# Altium PCB MPPT PCB.PcbDoc
Units mm, origin at the board's own origin, x right, y up, seen from the top; angles counter-clockwise.
Board outline 104.4 x 105.65 mm, 2 copper layers (Top Layer, Bottom Layer); 101 components, 54 nets, 293 pads, 71 vias.
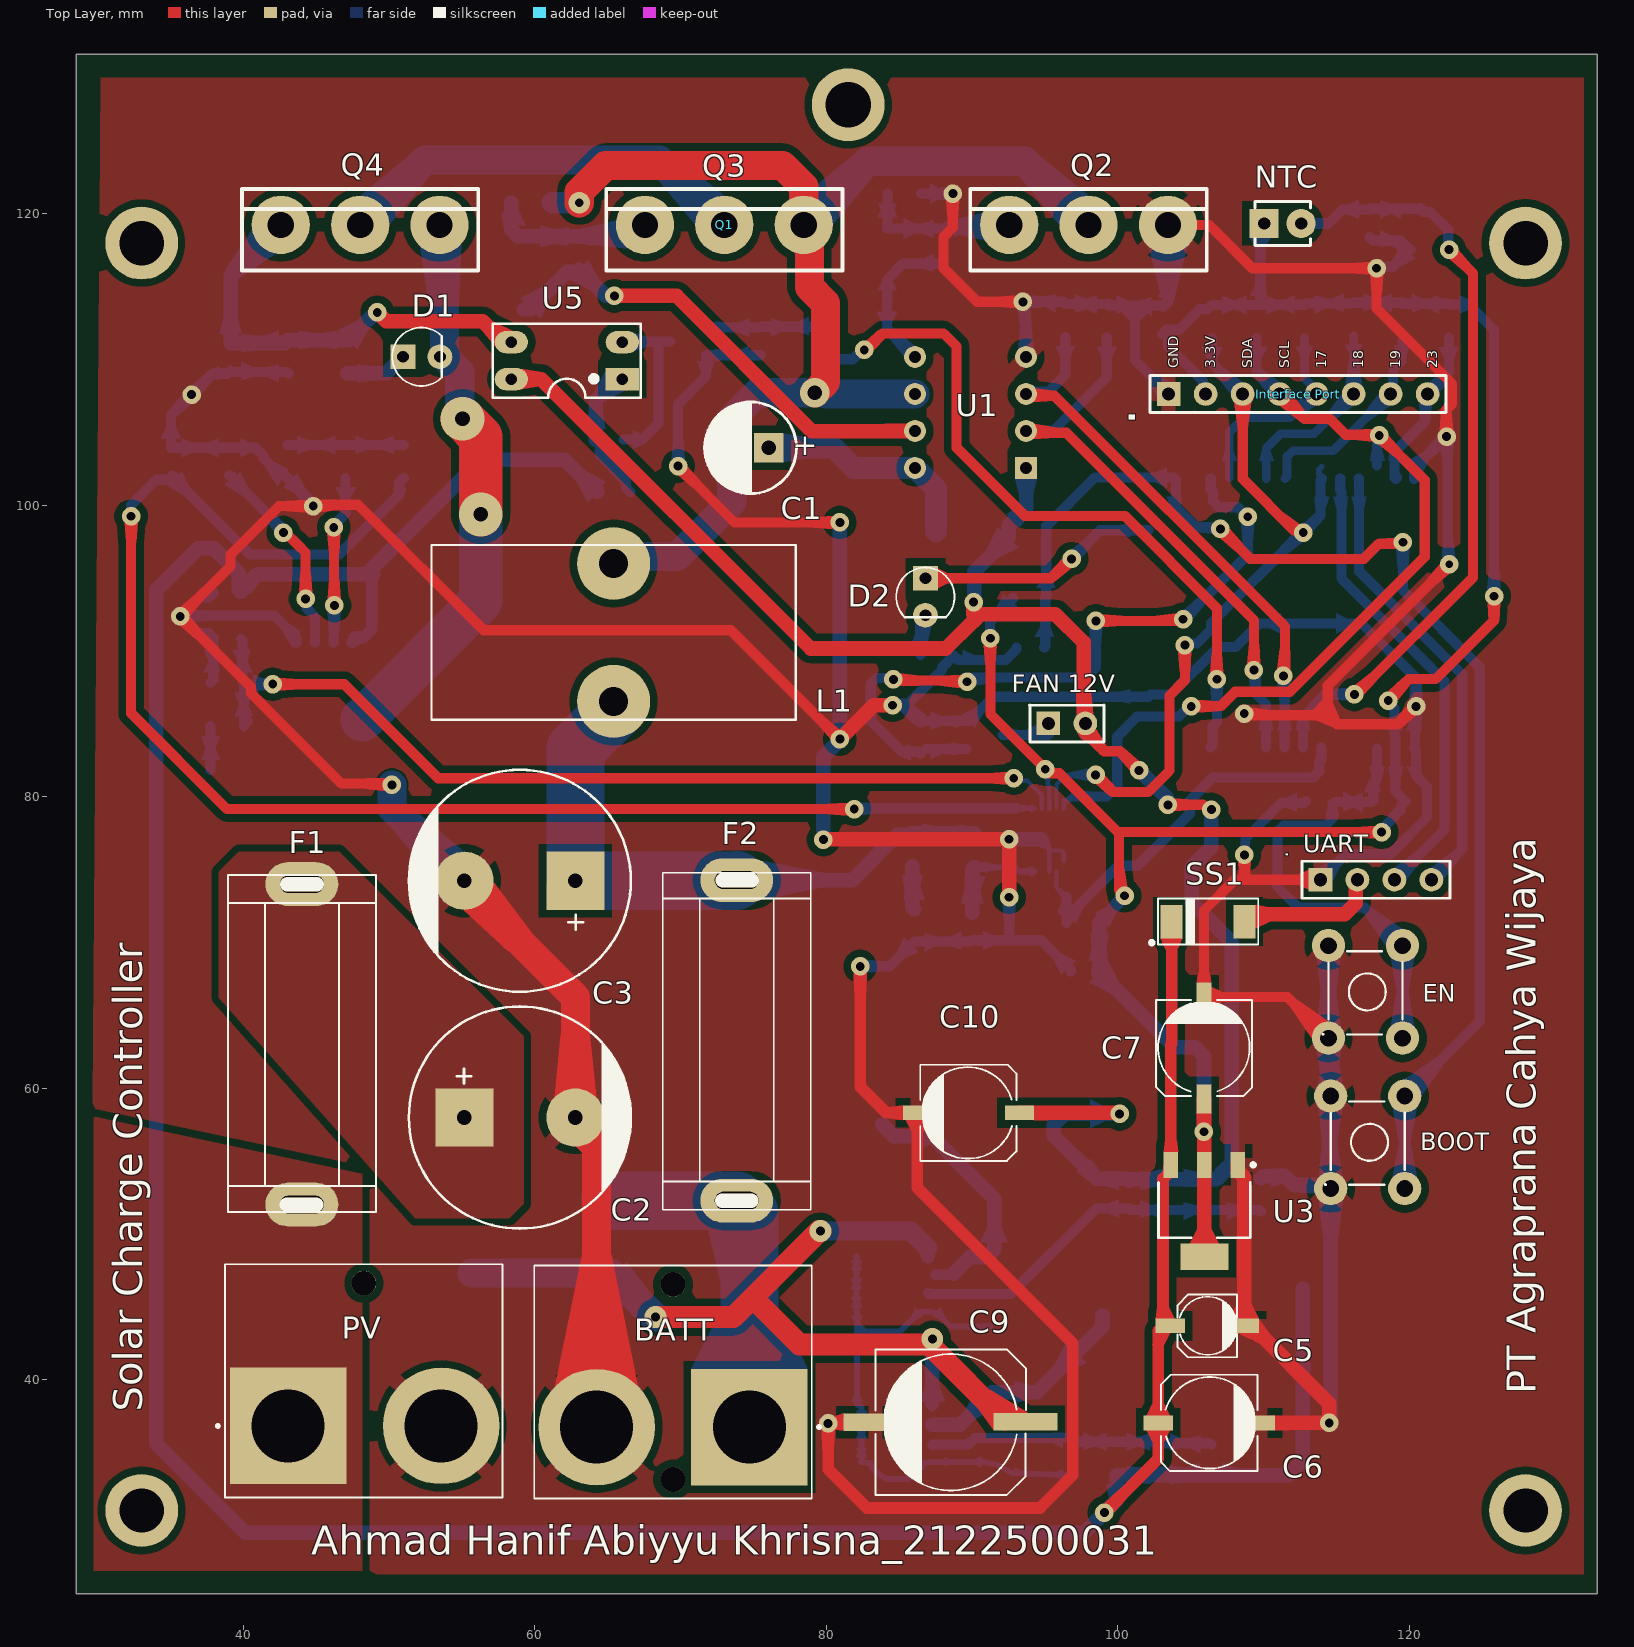
[diagram p0: Top Layer view]
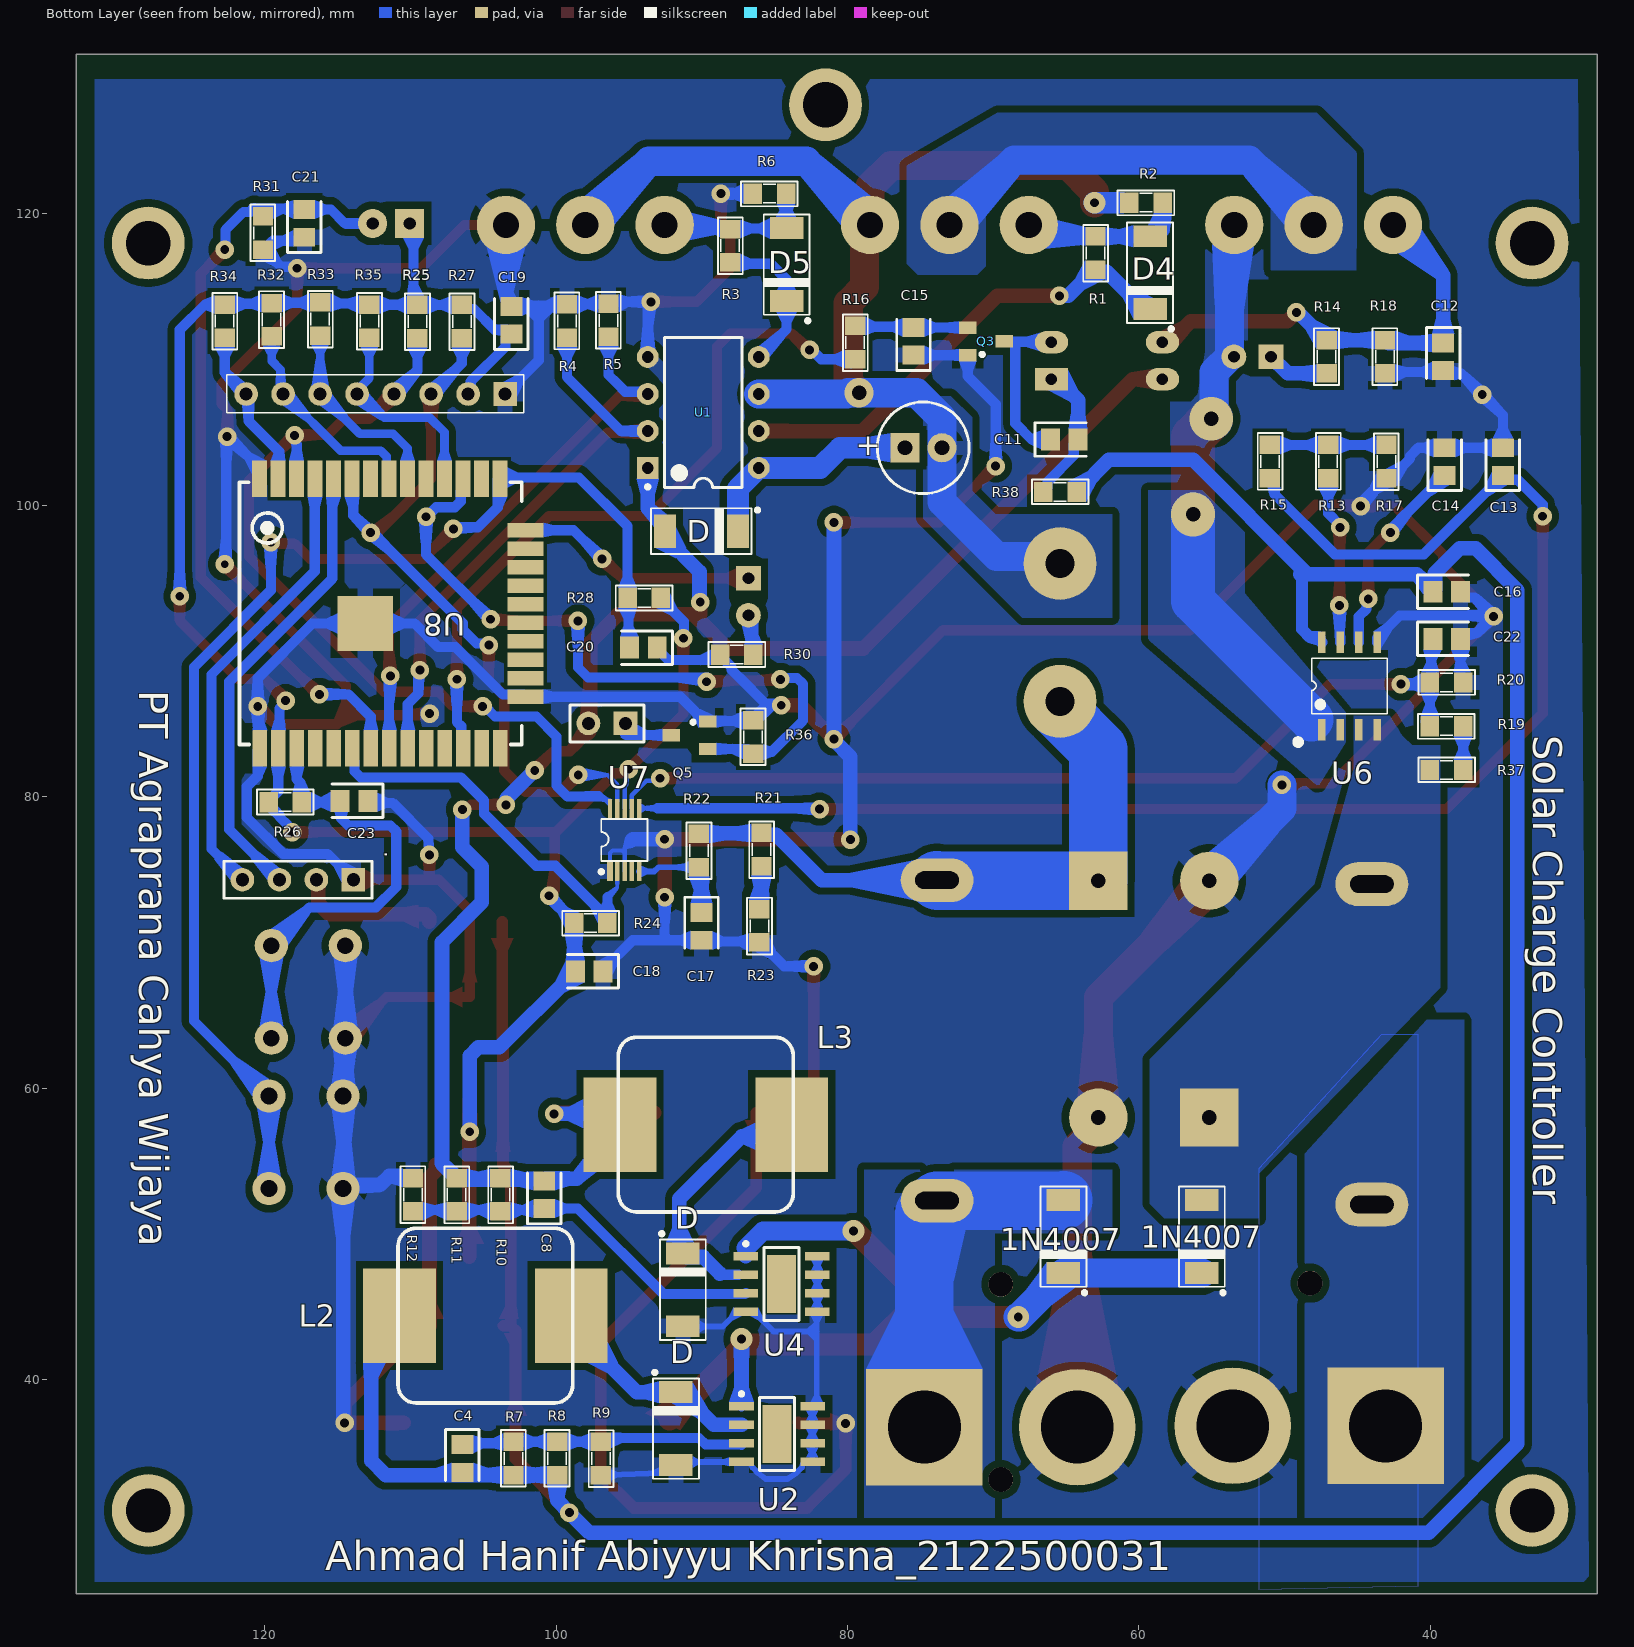
[diagram p1: Bottom Layer view, seen from below]
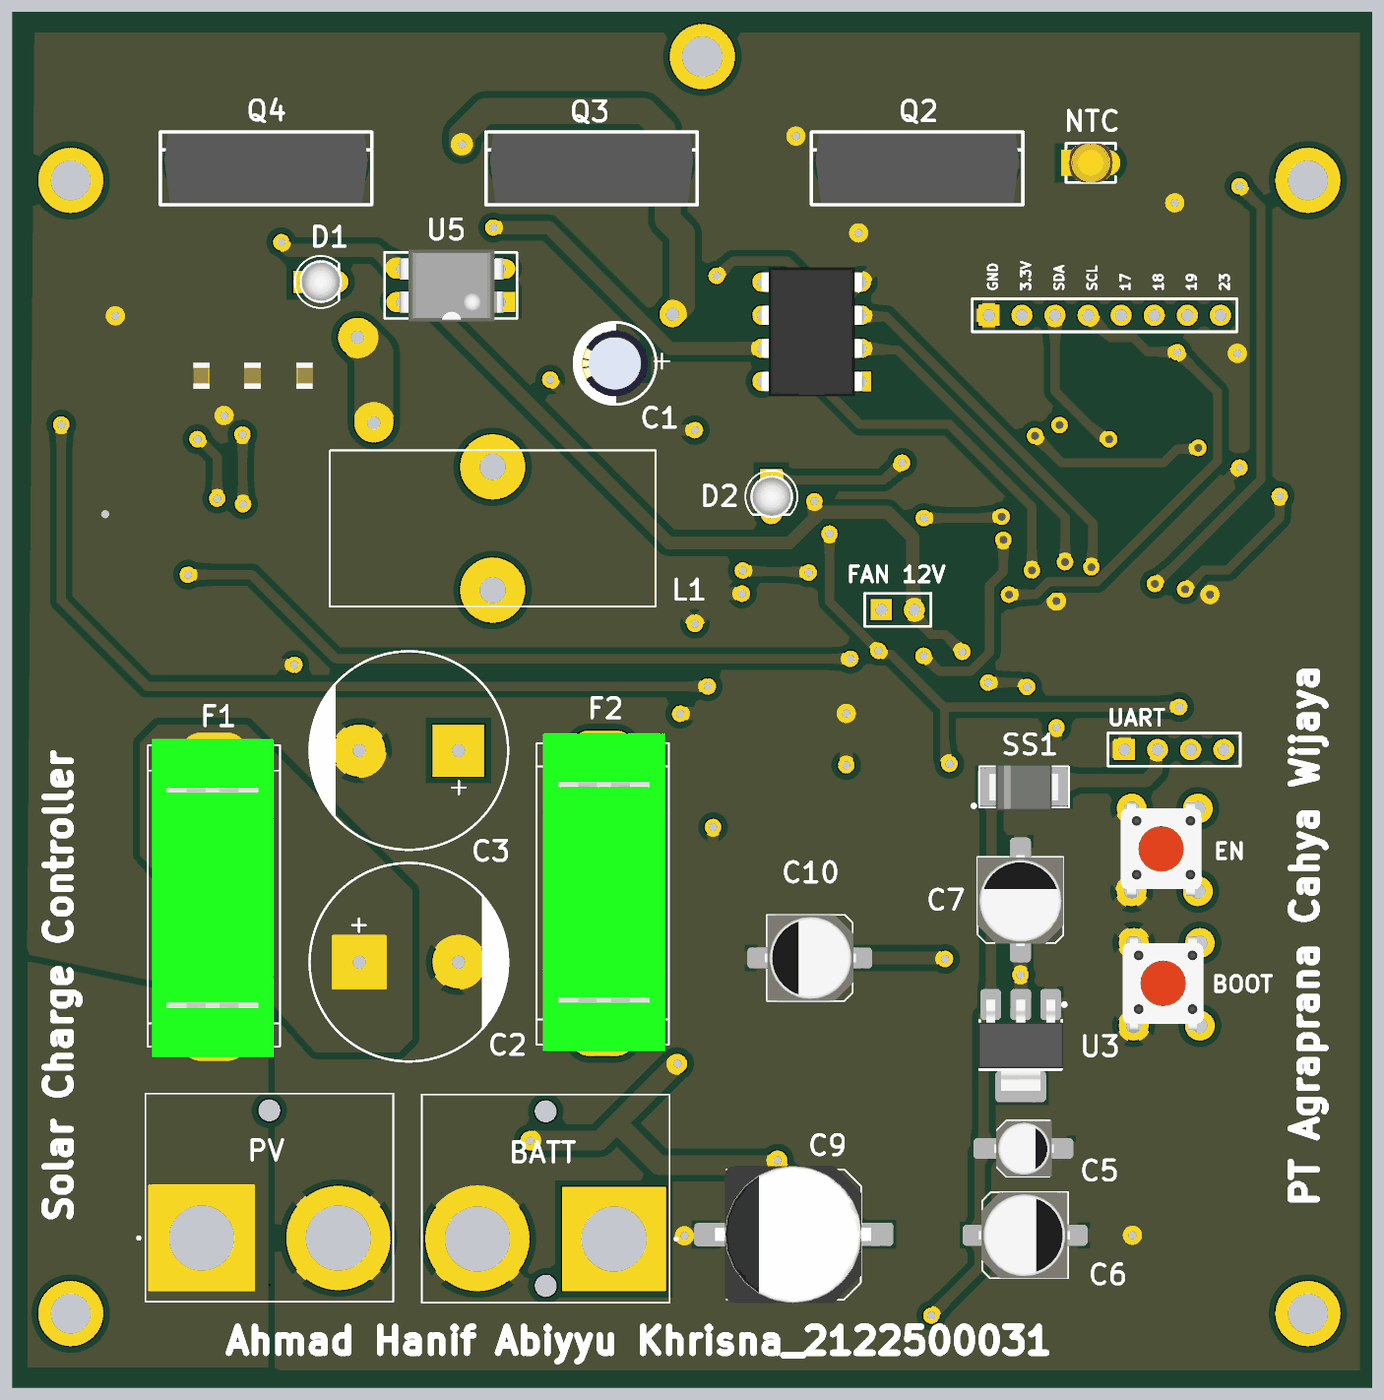
[diagram p2: 3D render of the assembled board from above, using the file's embedded part models]
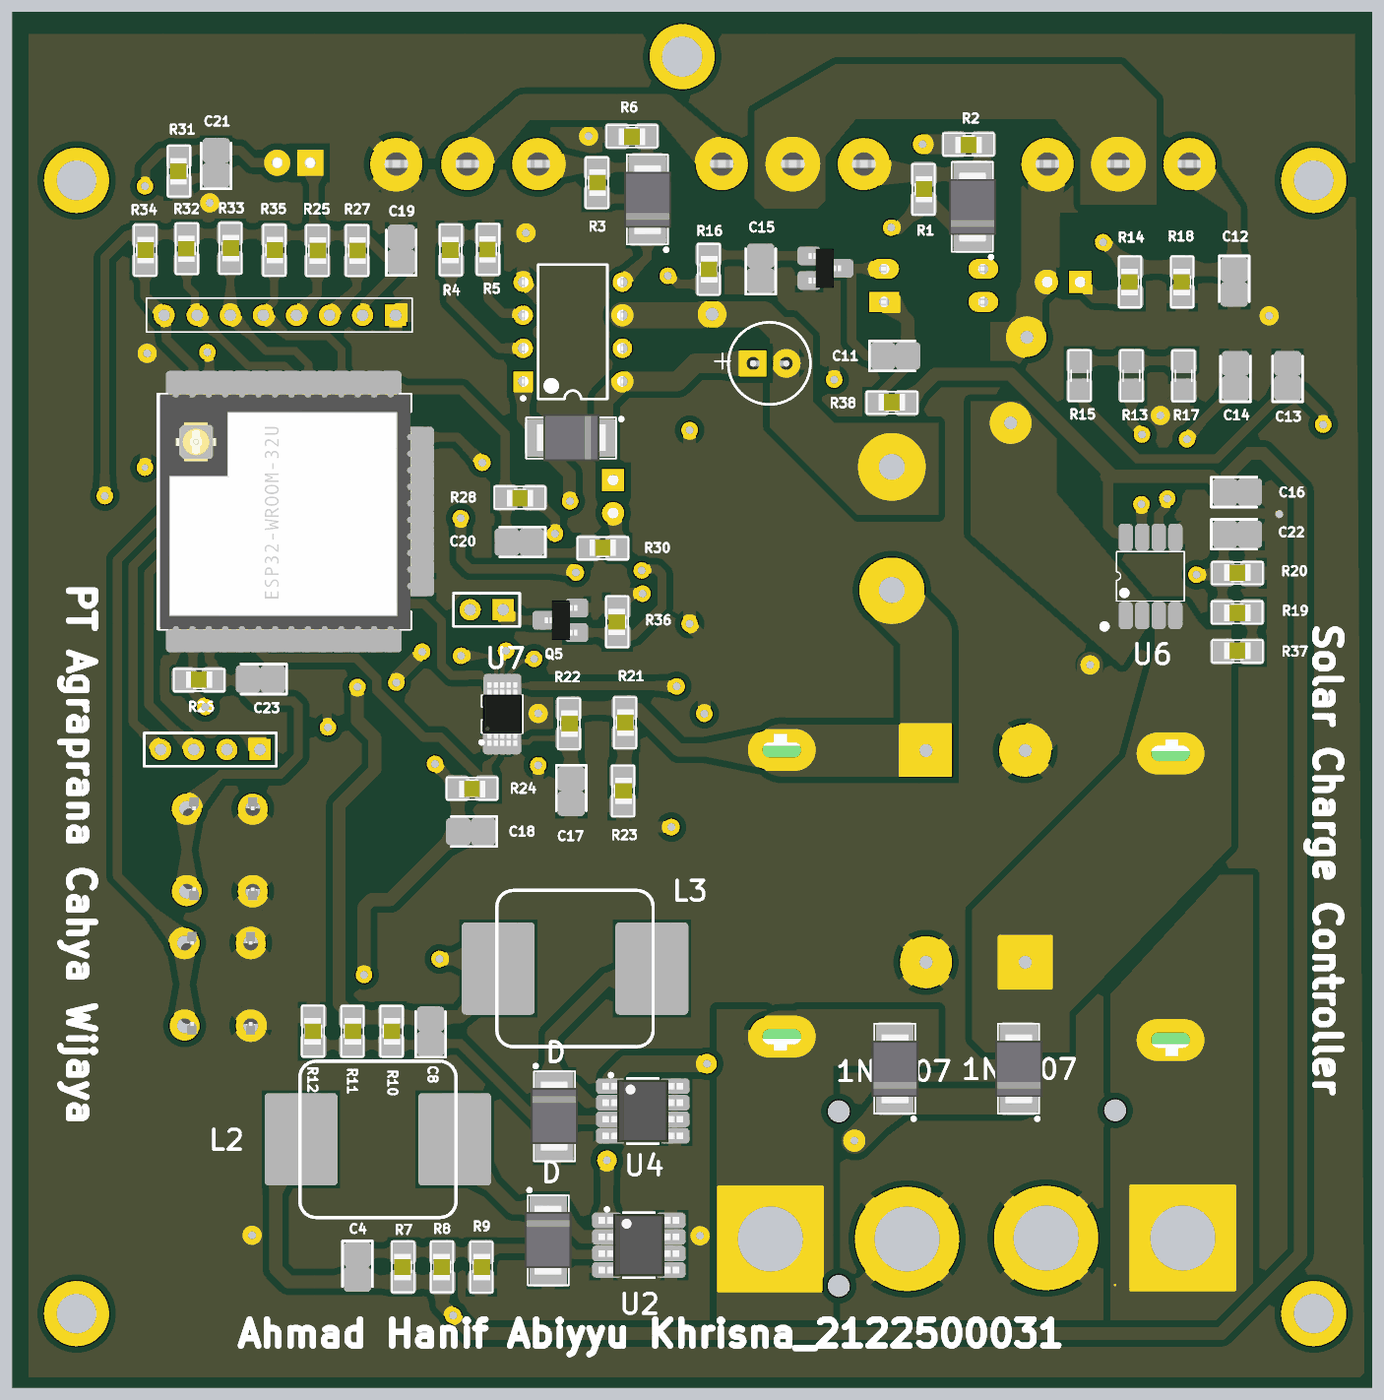
[diagram p3: 3D render of the assembled board from below, using the file's embedded part models]

## Layer stack, top to bottom
Top Solder: solder mask 0.0102, Solder Resist, Dk 3.5
Top Layer: signal copper 0.0356
Dielectric 1: dielectric 0.32, FR-4, Dk 4.8
Bottom Layer: signal copper 0.0356
Bottom Solder: solder mask 0.0102, Solder Resist, Dk 3.5

## Board outline
28.525,25.3 28.525,130.95 132.925,130.95 132.925,25.3

## Design rules (kind name [scope] priority, off if disabled: settings)
Clearance Clearance_5 [InNet('SCL') vs InNet('GPIO32')] p1: gap=0.1 ignorepadtopadclearanceinfootprint=TRUE
Clearance Clearance_3 [OnBottomLayer vs HasFootprint('SOIC-8N')] p2: gap=0.1 ignorepadtopadclearanceinfootprint=TRUE
Clearance Clearance_1 [(OnBottomLayer) vs HasFootprint('MSOP-10')] p3: gap=0.1 ignorepadtopadclearanceinfootprint=TRUE
Clearance Clearance_2 [OnBottomLayer vs HasFootprint('ESP32-32U')] p4: gap=0.254 ignorepadtopadclearanceinfootprint=TRUE
Clearance [All] p5: gap=0.508 ignorepadtopadclearanceinfootprint=TRUE
PasteMaskExpansion [All] p1: expansion=0.3 thpadusetoppaste=TRUE thpadusebottompaste=TRUE
PlaneClearance [All] p1: clearance=1
PolygonConnect PolygonConnect_3 [InNet('Out -')] p1: connectstyle=Relief reliefconductorwidth=1 reliefentries=4 polygonreliefangle="90 Angle" conductorbypadedge=TRUE mindistance=0.381 enablemindistance=FALSE airgapwidth=0.5
PolygonConnect PolygonConnect_2 [InNet('Net1N4007_1_1')] p2: connectstyle=Direct reliefconductorwidth=0.254 reliefentries=4 polygonreliefangle="90 Angle" airgapwidth=0.254
PolygonConnect PolygonConnect_1 [InNet('NetF1_1') vs InNet('Net1N4007_1_1')] p3: connectstyle=Direct reliefconductorwidth=0.254 reliefentries=4 polygonreliefangle="90 Angle" airgapwidth=0.254
PolygonConnect [All] p4: thpad.connectstyle=Relief thpad.reliefconductorwidth=1 thpad.reliefentries=4 thpad.polygonreliefangle="90 Angle" thpad.airgapwidth=0.5 smdpad.connectstyle=Relief smdpad.reliefconductorwidth=0.25 smdpad.reliefentries=4 smdpad.polygonreliefangle="90 Angle" smdpad.airgapwidth=0.25 smdpad.conductorbypadedge=TRUE smdpad.mindistance=0.381 smdpad.enablemindistance=FALSE via.connectstyle=Direct via.reliefconductorwidth=1 via.reliefentries=4 via.polygonreliefangle="90 Angle" via.airgapwidth=0.5
RoutingVias [All] p1: holewidth=0.508 width=1.27 viastyle="Through Hole" minholewidth=0.508 minwidth=1.27 maxholewidth=1 maxwidth=5 // v
SolderMaskExpansion [All] p1: expansion=0.102 istentingtop=FALSE
SupplyNets "Schematic Supply Nets_21" [InNet('GPIO23')] p1: voltage=0.000
SupplyNets "Schematic Supply Nets_20" [InNet('GPIO17')] p2: voltage=0.000
SupplyNets "Schematic Supply Nets_19" [InNet('GPIO32')] p3: voltage=0.000
SupplyNets "Schematic Supply Nets_18" [InNet('GPIO18')] p4: voltage=0.000
SupplyNets "Schematic Supply Nets_17" [InNet('TX')] p5: voltage=0.000
SupplyNets "Schematic Supply Nets_16" [InNet('+5')] p6: voltage=0.000
SupplyNets "Schematic Supply Nets_15" [InNet('GPIO34')] p7: voltage=0.000
SupplyNets "Schematic Supply Nets_14" [InNet('GPIO16')] p8: voltage=0.000
SupplyNets "Schematic Supply Nets_12" [InNet('+3.3')] p9: voltage=0.000
SupplyNets "Schematic Supply Nets_11" [InNet('A3')] p10: voltage=0.000
SupplyNets "Schematic Supply Nets_10" [InNet('Out -')] p11: voltage=0.000
SupplyNets "Schematic Supply Nets_9" [InNet('+12')] p12: voltage=0.000
SupplyNets "Schematic Supply Nets_8" [InNet('GPIO33')] p13: voltage=0.000
SupplyNets "Schematic Supply Nets_7" [InNet('A1')] p14: voltage=0.000
SupplyNets "Schematic Supply Nets_6" [InNet('GPIO27')] p15: voltage=0.000
SupplyNets "Schematic Supply Nets_5" [InNet('GPIO35')] p16: voltage=0.000
SupplyNets "Schematic Supply Nets_4" [InNet('RX')] p17: voltage=0.000
SupplyNets "Schematic Supply Nets_3" [InNet('A2')] p18: voltage=0.000
SupplyNets "Schematic Supply Nets_2" [InNet('SDA')] p19: voltage=0.000
SupplyNets "Schematic Supply Nets_1" [InNet('SCL')] p20: voltage=0.000
SupplyNets "Schematic Supply Nets" [InNet('GPIO19')] p21: voltage=0.000
Width [All] p1: maxlimit=4 minlimit=0.1 preferedwidth=0.4 minimp=50.000000 maximp=50.000000 favimp=50.000000
Width Width_1 [All] p2: maxlimit=4 minlimit=0.3 preferedwidth=2 minimp=50.000000 maximp=50.000000 favimp=50.000000
28 further rules are at their usual default settings.

## Components (designator, comment, footprint, x,y, rotation, side; value= is the part's Value field where it differs from the comment)
1N4007 "Diode" DO-214AA,SMB 55.674,52.302 r270 bottom value=FRxxx (schematic designator 1N4007_1)
1N4007 "1N4007" DO-214AA,SMB 65.174,52.302 r270 bottom value=FRxxx (schematic designator 1N4007_2)
BATT "BATT" PHOENIX_1904147#1 78.994,47.827 r180 top
BOOT "SW" SW4 119.705,59.45 r270 top value="Button chip 4 pin" (schematic designator SW6)
C1 "Cap Pol" "RADIAL C" 76.05,103.95 r180 top value=10uF
C2 "470uF/100V" CP3/7 55.155,57.975 r0 top value=2200uF/16V
C3 "470uF/100V" CP3/7 62.775,74.225 r180 top value=2200uF/16V
C4 "100nF" C2012-0805#1 106.425,34.575 r270 bottom
C5 "4.7uF" Cap_smd_4_3MM_N 106.15,43.675 r0 top
C6 "100uF" CAP_SMD_6_3MM_N 106.285,37.012 r0 top
C7 "4.7uF" CAP_SMD_6_3MM_N 105.925,62.75 r90 top
C8 "100nF" C2012-0805#1 100.825,52.675 r90 bottom
C9 "47uF" CAP_SMD_10MM 88.525,37.075 r180 top
C10 "100uF" CAP_SMD_6_3MM_N 89.75,58.3 r180 top
C11 "100nF" C2012-0805#1 65.125,104.525 r180 bottom
C12 "100nF" C2012-0805#1 39.1,110.2 r270 bottom
C13 "2.2uF" C2012-0805#2 35,103 r90 bottom
C14 "2.2uF" C2012-0805#2 39,103 r90 bottom
C15 "100nF" C2012-0805#1 75.474,111.252 r90 bottom
C16 "4.7uF" C2012-0805#1 38.874,94.077 r180 bottom
C17 "100nF" C2012-0805#1 90.01,71.102 r270 bottom
C18 "100nF" C2012-0805#1 97.725,68 r0 bottom
C19 "100nF" C2012-0805#1 103.075,112.693 r90 bottom
C20 "100nF" C2012-0805#1 94,90.225 r0 bottom
C21 "100nF" C2012-0805#1 117.293,119.35 r90 bottom
C22 "100nF" C2012-0805#1 38.874,90.837 r180 bottom
C23 "100nF" C2012-0805#1 113.87,79.707 r0 bottom
D "Diode" DO-214AA,SMB 91.775,34.125 r90 bottom value=FRxxx (schematic designator "SS310 D3")
D "Diode" DO-214AA,SMB 91.3,43.65 r90 bottom value=FRxxx (schematic designator "SS310 D2")
D "Diode" DO-214AA,SMB 92.525,98.225 r180 bottom value=FRxxx (schematic designator "SS310 D1")
D1 "LED" "LED-0 3mm YELLOW" 52.2,110.2 r90 top
D2 "LED" "LED-0 3mm YELLOW" 86.8,93.725 r0 top
D4 "Diode" DO-214AA,SMB 59.224,118.468 r270 bottom value=FRxxx (schematic designator "SS310 D4")
D5 "Diode" DO-214AA,SMB 84.174,119.027 r270 bottom value=FRxxx (schematic designator "SS310 D5")
EN "SW" SW4 119.55,69.775 r270 top value="Button chip 4 pin" (schematic designator SW5)
F1 "FUSE" "FUSE 24.5x9.5" 44,52 r90 top
F2 "FUSE" "FUSE 24.5x9.5" 73.85,74.27 r270 top
"FAN 12V" "IO" CON.HDR1X2 95.254,85.025 r0 top (schematic designator CN4)
"Interface Port" "CON.HDR1x8" CON1X8N 103.5,107.643 r0 top (schematic designator CN2)
L1 "60uH" 104836 65.4,91.275 r180 top
L2 "Inductor" RH127 104.859,44.374 r270 bottom value=100uH
L3 "Inductor" RH127 89.726,57.487 r270 bottom value=100uH
NTC "NTC 10K" FP-NTCLE100E3104JB0-MFG 111.325,119.35 r0 top (schematic designator R29)
PV "PV" PHOENIX_1904147#2 38.729,47.902 r0 top
Q1 "HY528" TO-247 67.551,119.252 r0 top
Q2 "HY528" TO-247 92.551,119.252 r0 top
Q3 "C1815" SOT23B 70.499,111.252 r270 bottom
Q4 "HY528" TO-247 42.551,119.252 r0 top
Q5 "C1815" SOT23B 90.85,84.225 r90 bottom
R1 "100" SM-0805 62.975,117.325 r90 bottom value=1K
R2 "100K" SM-0805 59.5,120.775 r180 bottom value=1K
R3 "100" SM-0805 88.049,117.827 r90 bottom value=1K
R4 "10K" SM-0805 99.25,112.65 r270 bottom value=1K
R5 "10K" SM-0805 96.4,112.7 r270 bottom value=1K
R6 "100K" SM-0805 85.35,121.4 r180 bottom value=1K
R7 "33K" SM-0805 102.925,34.575 r270 bottom value=1K
R8 "33K" SM-0805 99.925,34.575 r270 bottom value=1K
R9 "5.1K" SM-0805 96.925,34.575 r90 bottom value=1K
R10 "15K" SM-0805 103.825,52.675 r90 bottom value=1K
R11 "15K" SM-0805 106.825,52.675 r90 bottom value=1K
R12 "1K" SM-0805 109.825,52.675 r270 bottom
R13 "3.3K" SM-0805 47,103 r270 bottom value=1K
R14 "10K" SM-0805 47.1,110.2 r270 bottom value=1K
R15 "1K" SM-0805 51,103 r270 bottom
R16 "100" SM-0805 79.474,111.177 r90 bottom value=1K
R17 "10K" SM-0805 43,103 r90 bottom value=1K
R18 "10K" SM-0805 43.1,110.2 r270 bottom value=1K
R19 "100K" SM-0805 38.874,84.837 r180 bottom value=1K
R20 "5.1K" SM-0805 38.874,87.837 r0 bottom value=1K
R21 "1K" SM-0805 85.9,76.375 r90 bottom
R22 "1K" SM-0805 90.2,76.3 r90 bottom
R23 "1K" SM-0805 86.049,71.134 r90 bottom
R24 "10K" SM-0805 97.625,71.325 r180 bottom value=1K
R25 "10K" SM-0805 109.525,112.618 r90 bottom value=1K
R26 "10K" SM-0805 118.6,79.625 r0 bottom value=1K
R27 "10K" SM-0805 106.475,112.618 r90 bottom value=1K
R28 "10K" SM-0805 93.95,93.65 r180 bottom value=1K
R30 "10K" SM-0805 87.6,89.75 r0 bottom value=1K
R31 "10K" SM-0805 120.125,118.7 r270 bottom value=1K
R32 "10K" SM-0805 119.525,112.743 r270 bottom value=1K
R33 "10K" SM-0805 116.2,112.793 r90 bottom value=1K
R34 "10K" SM-0805 122.75,112.643 r90 bottom value=1K
R35 "10K" SM-0805 112.825,112.643 r90 bottom value=1K
R36 "10K" SM-0805 86.475,84.1 r270 bottom value=1K
R37 "100K" SM-0805 38.874,81.837 r0 bottom value=1K
R38 "220" SM-0805 65.4,100.92 r0 bottom value=1K
SS1 "Diode" DO-214AA,SMB 108.7,71.425 r180 top value=FRxxx
U1 "IR2104" DIP-8 89.899,106.377 r180 bottom
U2 "XL7005A" SOIC-8N 84.825,36.25 r180 bottom
U3 "LM1117MP-3.3TR" "SOT-223 3N" 105.95,51.575 r270 top
U4 "XL7005A" SOIC-8N 84.524,46.552 r180 bottom
U5 "PC817" DIP4/W0.3 65.994,108.662 r90 top
U6 "Current Sense" SOIC8N 47.44,84.6 r90 bottom
U7 "ADS1115" MSOP-10 96.3,74.875 r180 bottom
U8 "ESP32-WROOM-32U" ESP32-32U 102.1,85.593 r90 bottom locked
UART "IO" CON.HDR1X4 113.92,74.3 r0 top
? "Comment" CP#1 125.675,125.1 r0 top
? "Comment" CP#2 126.425,30.325 r0 top
? "Comment" CP#3 32.225,29.025 r0 top
? "Comment" CP#4 32.175,121.825 r0 top
? "Comment" CP#5 127.65,122.75 r0 top

## Footprints (in the part's own frame and the unit in brackets; to place one, negate y for a bottom-side part, rotate by r counter-clockwise, add the part's x,y. Pads: shape width x height; smd on the part's side, far side on the other; paste and mask are expansions set on the pad)
104836 [mm]
  round 5 hole 2 paste+0.3: P$1(0,-4.73)
  round 5 hole 2: P$2(0,4.73)
  silkscreen extent -12.5,-6 12.5,6
C2012-0805#1 [mm] "Capacitor Chip 0805 package"
  rect 1.3x1.5 smd: 1(-0.945,-0.007) 2(0.955,-0.007)
  silkscreen extent -1.99,-1.16 1.51,1.14, body extent -0.89,-0.58 0.89,0.58, height 0.79
C2012-0805#2 [mm] "Capacitor Chip 0805 package"
  rect 1.3x1.5 smd: 1(-0.945,0.007) 2(0.955,0.007)
  silkscreen extent -1.99,-1.14 1.51,1.16, body extent -0.89,-0.58 0.89,0.58, height 0.79
Cap_smd_4_3MM_N [mm] "10uF SMD"
  rect 2x1 smd: 1(-2.54,0) 2(2.54,0)
  silkscreen extent -2.03,-2.16 2.04,2.16, body extent -2.25,-2.17 2.35,2.13, height 5.41
CAP_SMD_6_3MM_N [mm] "47uF 25V"
  rect 2x1.016 smd: 1(-3.5,0) 2(3.5,0)
  silkscreen extent -3.3,-3.3 3.3,3.3, body extent -3.55,-3.3 3.45,3.3, height 5.41
CAP_SMD_10MM [mm] "47uF 25V"
  rect 4.4x1.2 smd: 1(-5.15,-0.012) 2(5.15,0.013)
  silkscreen extent -5.17,-4.99 5.15,5.01, body extent -5.95,-5.25 6.05,5.25, height 10.5
CON1X8N [mil]
  rect 64x64 hole 35.43: 1(0,0)
  round 64 hole 35.43: 2(100,0) 3(200,0) 4(300,0) 5(400,0) 6(500,0) 7(600,0) 8(700,0)
  silkscreen extent -50,-50 750,50, body extent -50,-50 750,50, height 350
CON.HDR1X2 [mil]
  rect 64x64 hole 35.43: 1(-0.44,0.28)
  round 64 hole 35.43: 2(99.56,0.28)
  silkscreen extent -51,-50 150,50, body extent -51,-50 149,50, height 350
CON.HDR1X4 [mil]
  rect 64x64 hole 35.43: 1(0,0)
  round 64 hole 35.43: 2(100,0) 3(200,0) 4(300,0)
  silkscreen extent -50,-50 350,50, body extent -50,-50 350,50, height 350
CP#1 [mm] "Connect Pad, 1-Pin"
  round 5 hole 3.1: 1(-44.175,2.4)
CP#2 [mm] "Connect Pad, 1-Pin"
  round 5 hole 3.05: 1(1.575,0.675)
CP#3 [mm] "Connect Pad, 1-Pin"
  round 5 hole 3.05: 1(0.775,1.975)
CP#4 [mm] "Connect Pad, 1-Pin"
  round 5 hole 3.05: 1(0.825,-3.825)
CP#5 [mm] "Connect Pad, 1-Pin"
  round 5 hole 3.05: 1(0.35,-4.75)
CP3/7 [mm] "Tu hoa 4700uF/25V"
  rect 4x4 hole 1: 1(0,0)
  round 4 hole 1: 2(7.62,0)
  silkscreen extent -3.81,-7.62 11.43,7.62
DIP4/W0.3 [mil] "4 PIN, W 300mil, Pin to pin 100mil"
  rect 60x90 hole 31: 1(0,0)
  oval 60x90 hole 31: 2(100,0) 3(100,300) 4(0,300)
  silkscreen extent -50,-50 150,350, body extent -59,-10 159,305, height 170
DIP-8 [mm] "DIP, 8-Pin, Row Spacing 7.62 mm, Pitch 2.54 mm"
  rect 1.5x1.5 hole 0.813: 1(-3.81,-3.81)
  round 1.5 hole 0.813: 2(-3.81,-1.27) 3(-3.81,1.27) 4(-3.81,3.81) 5(3.81,3.81) 6(3.81,1.27) 7(3.81,-1.27) 8(3.81,-3.81)
  silkscreen extent -3.94,-5.23 2.65,5.15, body extent -3.91,-4.96 3.91,4.95, height 3.81
DO-214AA,SMB [mm]
  rect 1.5x2.3 smd: 1(0,0) 2(5,0)
  silkscreen extent -0.95,-1.6 6.48,1.57, body extent -0.19,-1.78 5.21,1.82, height 2.3
ESP32-32U [mm]
  rect 2.5x1 smd: 1(-2.281,18.238) 2(-2.281,16.968) 3(-2.281,15.698) 4(-2.281,14.428) 5(-2.281,13.158) 6(-2.281,11.888) 7(-2.281,10.618) 8(-2.281,9.348) 9(-2.281,8.078) 10(-2.281,6.808) 11(-2.281,5.538) 12(-2.281,4.268) 13(-2.281,2.998) 14(-2.281,1.728) 25(16.235,1.75) 26(16.235,3.02) 27(16.235,4.29) 28(16.235,5.56) 29(16.235,6.83) 30(16.235,8.1) 31(16.235,9.37) 32(16.235,10.64) 33(16.235,11.91) 34(16.235,13.18) 35(16.235,14.45) 36(16.235,15.72) 37(16.235,16.99) 38(16.235,18.26)
  rect 1x2.5 smd: 15(1.27,0) 16(2.54,0) 17(3.81,0) 18(5.08,0) 19(6.35,0) 20(7.62,0) 21(8.89,0) 22(10.16,0) 23(11.43,0) 24(12.7,0)
  rect 3.8x3.8 smd: 39(6.3,11)
  silkscreen extent -2.02,0.25 15.98,19.63, body extent -2.07,0.24 16,19.48, height 3.4
FP-NTCLE100E3104JB0-MFG [mm]
  rect 2x2 hole 0.85 paste-2539.97 mask+0: 1(-1.27,0)
  round 2 hole 0.85 paste-2539.97 mask+0: 2(1.27,0)
  silkscreen extent -1.9,-1.5 1.9,1.5, body extent -2.04,-1.6 2.04,1.6, height 0.25
"FUSE 24.5x9.5" [mm]
  oval 3x5 hole 1.2 slot 3 at 90 deg unplated: 1(0,0) 2(22,0)
  silkscreen extent -0.51,-5.08 22.62,5.08, body extent -1.28,-4.6 23.12,4.8, height 11.5
"LED-0 3mm YELLOW" [mil] "Typical LED; YELLOW; RED; 2 Leads; Solder Pad 35mil"
  rect 67x67 hole 32: 1(0,50)
  round 67 hole 32: 2(0,-50)
  silkscreen extent -79,-56 79,79, body extent -63,-66 66,64, height 207
MSOP-10 [mm] "MSOP, Plastic; 10 Leads; Body 3x3 mm; Pitch 0.5 mm"
  rect 0.4x1.3 smd: 1(0,0)
  rect 0.3x1.3 smd: 2(0.5,0) 3(1,0) 4(1.5,0) 5(2,0) 6(2,4.3) 7(1.5,4.3) 8(1,4.3) 9(0.5,4.3) 10(0,4.3)
  silkscreen extent -0.72,-0.15 2.57,3.6, body extent -0.51,-0.29 2.49,4.61, height 1.12
PHOENIX_1904147#1 [mm]
  rect 8x8 / inner round 8 / far side rect 8x8 hole 5: 1(4.275,11.1)
  round 8 hole 5: 2(14.765,11.1)
  round 1.7 hole 1.7 unplated: ""(9.52,14.7) ""(9.52,1.3)
  silkscreen extent -0.6,0 19.04,16
PHOENIX_1904147#2 [mm]
  rect 8x8 / inner round 8 / far side rect 8x8 hole 5: 1(4.325,-11.1)
  round 8 hole 5: 2(14.825,-11.1)
  round 0 all layers, no hole: ""(9.52,-14.7)
  round 1.7 hole 1.7 unplated: ""(9.52,-1.3)
  silkscreen extent -0.6,-16 19.04,0
"RADIAL C" [mm] "Capacitor, Electrolytic, Radial; Body 6.3 x 6.8 mm (Dia.xH typ); Pin Spacing 2.5 mm (typ)"
  rect 2x2 hole 1: 1(0,0)
  round 2 hole 1: 2(2.54,0)
  silkscreen extent -1.9,-3.15 4.4,3.15, body extent -1.27,-2.54 3.81,2.54, height 13.7
RH127 [mm] "RH127 inductor 12*12*7 (100uH)"
  rect 6.5x5 smd: 1(0,5.9) 2(0,-5.9)
  silkscreen extent -6,-6 6,6, body extent -5.98,-6 6.05,5.97, height 7
SM-0805 [mil] "Compoment SMD 80x50mil"
  rect 50x55 smd: 1(-45,0) 2(45,0)
  silkscreen extent -77,-34 76,33, body extent -40,-27 40,23, height 24
SOIC8N [mm]
  rect 1.5x0.5 smd: 1(0,0) 2(0,-1.27) 3(0,-2.54) 4(0,-3.81) 5(6,-3.81) 6(6,-2.54) 7(6,-1.27) 8(6,0)
  silkscreen extent -1.05,-4.5 4.9,1.83, body extent -0.13,-4.55 6.12,0.75, height 1.76
SOIC-8N [mm] "SOIC, 8-Leads, Body 4.9x3.9mm, Pitch 1.27mm, IPC High Density"
  rect 1.7x0.6 smd: 1(-2.45,1.905) 2(-2.45,0.635) 3(-2.45,-0.635) 4(-2.45,-1.905) 5(2.45,-1.905) 6(2.45,-0.635) 7(2.45,0.635) 8(2.45,1.905)
  rect 2x4 smd: 12(0,0)
  silkscreen extent -2.58,-2.5 1.2,2.88, body extent -3.1,-2.41 3.1,2.41, height 1.7
SOT23B [mm] "SOT 23B"
  rect 0.85x1.2 smd: 1(0.94,-1.245) 2(0,1.25) 3(-0.95,-1.25)
  silkscreen extent 0.77,-0.38 1.02,-0.13, body extent -1.5,-1.3 1.5,1.2, height 1.06
"SOT-223 3N" [mm]
  rect 1.8x1 smd: 1(-3.15,2.3) 2(-3.15,0) 3(-3.15,-2.3)
  rect 1.8x3.3 smd: 2(3.15,0)
  silkscreen extent -3.27,-3.15 1.85,3.48, body extent -3.53,-3.25 3.47,3.25, height 1.69
SW4 [mil] "SW button 4pin, 250 x250 mil"
  round 90 hole 45: 1(0,0) 2(250,-200) 3(250,0) 4(0,-200)
  silkscreen extent 15,-215 240,0, body extent -34,-233 278,11, height 276
TO-247 [mm] "TO-247; 3 Leads; Solder Pad 60mil"
  round 4 hole 1.8: 1(0,0) 2(5.448,0) 3(10.897,0)
  silkscreen extent -2.67,-3.12 13.56,2.46, body extent -2.35,-2.98 13.25,2.32, height 26.35

## Part data
1N4007: library part Diode, "Diode", Code_JEDEC=DO-204-AH, ComponentLink1Description="Digikey Part Link", ComponentLink1URL=http://www.fairchildsemi.com/, ComponentLink2Description="Open Datasheet", ComponentLink2URL=H:\LIBRARY\LIBRARY.Datasheet\ds26003.pdf, DatasheetDocument=1997, LatestRevisionDate=17-Jul-2002, LatestRevisionNote="Re-released for DXP Platform.", PackageReference=DO-35, Published=8-Jun-2000, Publisher="Altium Limited", Vendor=Digikey
BATT PV: library part 1904147, "PCB Terminal Screw 9.52mm 10AWG 1000V 32A 2 Position Combicon Power Series", Package=None, Check_prices=https://www.snapeda.com/parts/1904147/Phoenix+Contact/view-part/?ref=eda, MF="Phoenix Contact", MP=1904147, SnapEDA_Link=https://www.snapeda.com/parts/1904147/Phoenix+Contact/view-part/?ref=snap
BOOT EN: library part SW4, "Switch button 4 pin"
C1: "Polarized Capacitor", LatestRevisionDate=17-Jul-2002, LatestRevisionNote="Re-released for DXP Platform.", PackageReference=POLAR0.8, Published=8-Jun-2000, Publisher="Altium Limited"
C2 C3: library part CP6, "Cap 4700uF/16V - 2200uF/50V", Description 1="10KuF=>22KuF/6,3V - 6800uF=>15KuF/10V", Description 2="4700uF=>10KuF/16V - 3300uF => 6800uF/25V", Description 3=2200uF=>3300uF/50V_1KuF=>2200uF/63V, Description 4="470uF => 1KuF/100V - 220uF-470uF/160V", Description 5="100uF=>220uF/200V -100uF=>330uF/350V", Description 6="33uF=>100/350V-400V  -  22uF=>33uF/450V"
C4 C8 C11 C12 C13 C14 C15 C16 C17 C18 C19 C20 C21 C22 C23: library part Capacitor, "Capacitor", Volt=16V, AEMS Code=2100341, ComponentLink1Description="Digikey Part Link", ComponentLink2Description="Open Datasheet", ComponentLink2URL=H:\LIBRARY\LIBRARY.Datasheet\, Published=13-April-2009, Publisher="Hoang Nguyen", Vendor=Digikey
C5 C6 C7 C10: library part Cap_Pol, "Polarized Capacitor", Capacitor Type=Tant, Manufacturer=FARNELL, Volt=25V, AEMS Code=2100110, ComponentLink1Description="Digikey Part Link", ComponentLink2Description="Open Datasheet", ComponentLink2URL=H:\LIBRARY\LIBRARY.Datasheet\, Published=13-April-2009, Publisher="Hoang Nguyen", Vendor=Digikey
C9: library part Cap_Pol, "Polarized Capacitor", Manufacturer=FARNELL, AEMS Code=2100110, ComponentLink1Description="Digikey Part Link", ComponentLink2Description="Open Datasheet", ComponentLink2URL=H:\LIBRARY\LIBRARY.Datasheet\, Published=13-April-2009, Publisher="Hoang Nguyen", Vendor=Digikey, Volt=47uF
D1 D2: "Typical LED", LatestRevisionDate=08-Jul-2005, LatestRevisionNote="Mech Layer 1 removed.", PackageReference=LED-1, Published=8-Jun-2000, Publisher="Altium Limited"
F1 F2: library part FUSE_1, ComponentLink1Description="Digikey Part Link", ComponentLink2Description="Open Datasheet", ComponentLink2URL=H:\LIBRARY\LIBRARY.Datasheet\, Published=13-April-2009, Publisher="Hoang Nguyen", Vendor=Digikey
"FAN 12V": library part CON.HDR1x2, "Header 1x2", ComponentLink1Description="Digikey Part link", ComponentLink2Description="Open DataSheet", ComponentLink2URL=H:\LIBRARY\LIBRARY.Datasheet\, Publisher="Hoang Nguyen"
"Interface Port": "Header 1x8", ComponentLink1Description="Digikey Part link", ComponentLink2Description="Open DataSheet", ComponentLink2URL=H:\LIBRARY\LIBRARY.Datasheet\, Publisher="Hoang Nguyen"
L1: library part 1048436, "Toroidal Power Inductor 100uH 3A 80mOhms Radial Leaded Mount 25 x 12mm", Package=None, Availability="In Stock", Check_prices=https://www.snapeda.com/parts/1048436/RS+Pro/view-part/?ref=eda, MF="RS Pro", MP=1048436, Price=None, SnapEDA_Link=https://www.snapeda.com/parts/1048436/RS+Pro/view-part/?ref=snap
NTC: library part CMP-02404-000021-1, "NTC THERMISTOR 100K OHM 5% BEAD", Case/Package=Radial, Max Operating Temperature=125°C, Max Power Dissipation=500mW, Min Operating Temperature=-40°C, Package Quantity=500, Resistance=100kR, Resistance Tolerance=5%, Accuracy=1.5%, Depth=3mm, Height=9mm, Lead Diameter=0.6mm, Lead Free="Lead Free", Lead Length=17mm, Lead Pitch=2.54mm, Length=3.3mm, Mount="Through Hole", Number of Pins=2, Packaging=Bulk, Radiation Hardening=No, RoHS Compliant=Yes, Series=2322, Termination=Radial, Tolerance=5%
Q1 Q2 Q4: library part IRFP460, "HEXFET Power MOSFET", Code_JEDEC=TO-247-AC, ComponentLink1Description="Manufacturer Link", ComponentLink1URL=http://www.irf.com/, ComponentLink2Description=Datasheet, ComponentLink2URL=http://www.irf.com/product-info/datasheets/data/irfp460.pdf, DatasheetVersion=PD-9.512B, LatestRevisionDate=17-Jul-2002, LatestRevisionNote="Re-released for DXP Platform.", Note="Pin 2 is electrically connected to the Heatsink (4).", PackageDescription="SIP with Mounting Hole; 3 Leads; Body 20 x 15.6 x 5 mm (typ); Pitch 5.45 mm", PackageReference=TO-247AC, PackageVersion=Aug-1997, Published=8-Jun-2000, Publisher="Altium Limited"
Q3 Q5: library part C1815_1, "NPN 600mW, ECB"
R1 R2 R3 R4 R5 R6 R7 R8 R9 R10 R11 R12 R13 R14 R15 R16 R17 R18 R19 R20 R21 R22 R23 R24 R25 R26 R27 R28 R30 R31 R32 R33 R34 R35 R36 R37 R38: library part RM, "Resistor SMD"
U1: "High and Low Side Driver", Code_JEDEC=MO-001-AN, ComponentLink1Description="Manufacturer Link", ComponentLink1URL=http://www.irf.com/, ComponentLink2Description=Datasheet, ComponentLink2URL=http://www.irf.com/product-info/datasheets/data/ir2104.pdf, DatasheetDocument=PD600461, LatestRevisionDate=04-Mar-2005, LatestRevisionNote="Stylized 3D Model Added.", PackageReference=PDIP8, Published=8-Jun-2000, Publisher="Altium Limited"
U2 U4: "XL7005A - Buck Converter"
U3: "3.3V 800mA Low-Dropout Linear Regulator", Output Current (max)=800mA, PSpiceTemplate="X^@REFDES %IN %OUT %GND @MODEL", Volt (Max)=20V, ComponentLink1Description="Digikey Part Link", ComponentLink1URL=http://search.digikey.com/scripts/DkSearch/dksus.dll?Detail&name=LM1117MP-3.3TR-ND, ComponentLink2Description="Open Datasheet", ComponentLink2URL=H:\LIBRARY\LIBRARY.Datasheet\LM1117.pdf, Price="4.000 VND", Published=13-April-2009, Publisher="Hoang Nguyen", V out=3.3V, Vendor=Digikey
U5: library part PC817_1, "Single Opto"
U6: library part ACS712_xxA, "Current Sense IC"
U7: "Ultra-Small, Low-Power, 16-Bit Analog-to-Digital Converter with Internal Reference"
UART: library part CON.HDR1x4, "Header 1x4", ComponentLink1Description="Digikey Part link", ComponentLink2Description="Open DataSheet", ComponentLink2URL=H:\LIBRARY\LIBRARY.Datasheet\, Publisher="Hoang Nguyen"
1N4007 D D D D4 D5 SS1: Code_JEDEC=DO-204-AH, ComponentLink1Description="Digikey Part Link", ComponentLink1URL=http://www.fairchildsemi.com/, ComponentLink2Description="Open Datasheet", ComponentLink2URL=H:\LIBRARY\LIBRARY.Datasheet\ds26003.pdf, DatasheetDocument=1997, LatestRevisionDate=17-Jul-2002, LatestRevisionNote="Re-released for DXP Platform.", PackageReference=DO-35, Published=8-Jun-2000, Publisher="Altium Limited", Vendor=Digikey
L2 L3: Code_IEC=1005, Code_JEITA=0402, LatestRevisionDate=17-Jul-2002, LatestRevisionNote="Re-released for DXP Platform.", PackageReference=0402-A, Published=8-Jun-2000, Publisher="Altium Limited"

## Via types
v1: diameter 1.27, hole 0.61, Top Layer to Bottom Layer, 62 vias
v2: diameter 1.5, hole 0.61, Top Layer to Bottom Layer, 4 vias
v3: diameter 3, hole 1, Top Layer to Bottom Layer, 2 vias
v4: diameter 1.27, hole 0.61, Top Layer to Bottom Layer, tented top, 1 vias
v5: diameter 1.27, hole 0.508, Top Layer to Bottom Layer, 1 vias
v6: diameter 2, hole 1, Top Layer to Bottom Layer, 1 vias

## Nets (pads, with @x,y where several pads share a name; then routed paths per layer and width w, separated by ;. In a path a pad name is that pad's centre, name@x,y a point inside that pad or via, vN(x,y) a via of type N, cw(c..) or ccw(c..) an arc to the next point about the centre after c; other vN are vias at no path point)
+3.3: "Interface Port.2" C7.1 C18.2 C19.1 NTC.1 R24.1 R25.2 R26.2 R27.2 R28.2 R32.1 R33.2 R34.2 R35.2 U3.2 U7.8 U8.2 | length 153
  Top Layer w0.7: v1(91.262,90.876) 91.262,85.676 94.363,82.575 94.363,82.573 95.024,81.912 v1(95.025,81.884) 95.197,81.712 95.306,81.603 95.984,81.603 100.087,77.5 100.087,73.588 v1(100.475,73.2) ; 100.087,77.568 v1(118.121,77.568) ; v1(118.575,86.6) 118.575,86.672 119.978,88.075 121.825,88.075 125.827,92.077 125.827,93.755 v1(125.834,93.762)
  Top Layer w1: v1(105.925,57) C7.1@105.925,59.225 ; U3.2@105.95,48.425 105.95,54.725 v1@105.95,57
  Bottom Layer w0.2: U7.8 U7.8@95.307,79.182
  Bottom Layer w0.3: v1(95.025,81.884) 95.197,81.712 95.197,80.829 95.3,80.726 95.3,79.468 95.307,79.461 U7.8@95.307,79.182
  Bottom Layer w0.7: v1(91.262,90.876) 91.23,90.908 91.23,92.009 92.807,93.587 R28.2 ; R24.1@98.768,71.388 100.475,73.095 v1(100.475,73.2) ; C19.1 103.368,112.048 104.211,112.048 105.639,113.476 106.19,113.476 R27.2 R25.2 R25.2@109.538,113.774 ; C19.1@103.168,111.748 103.468,111.448 103.468,110.907 105.863,108.512 105.863,107.82 106.04,107.643 ; NTC.1 109.79,119.085 109.79,114.026 R25.2@109.538,113.774 ; v1(118.121,77.568) 118.121,77.722 118.406,78.007 118.406,78.028 118.95,78.571 118.95,78.664 119.458,79.172 119.458,79.39 R26.2@119.693,79.625 ; v1(118.575,86.6) 118.575,86.46 118.995,86.04 118.995,84.205 119.068,84.132 119.068,80.363 R26.2@119.743,79.688 ; R34.2 122.7,113.836 119.575,113.836 R32.1 119.5,113.911 116.225,113.911 R33.2 116.125,113.861 112.9,113.861 R35.2 112.812,113.774 R25.2@109.538,113.774 ; R34.2@122.813,113.786 124.103,113.786 125.834,112.055 v1(125.834,93.762)
  Bottom Layer w1: R24.1@98.768,71.388 R24.1 98.724,71.281 98.724,68.051 C18.2 98.68,67.907 98.83,67.757 98.93,67.757 103.902,62.786 105.339,62.786 105.925,62.2 v1(105.925,57)
+5: C4.2 C5.1 C6.1 C16.1 L2.2 R7.2 R8.2 R38.1 SS1.2 U3.3 U6.8 | length 242.1
  Top Layer w0.8: v1(99.087,30.85) 102.785,34.548 C6.1 102.785,43.35 103.11,43.675 C5.1@103.26,43.675 ; C5.1 C5.1@103.26,43.675 ; SS1.2 103.7,63.042 103.65,62.992 U3.3 103.5,54.575 103.5,54.175 103.11,53.785 103.11,43.825 C5.1@103.26,43.675
  Bottom Layer w0.8: U6.8 47.59,90.75 47.59,90.95 48.264,90.95 48.8,91.486 48.8,95.177 48.898,95.275
  Bottom Layer w1: 48.425,95.275 56.275,103.125 62.052,103.125 64.058,101.119 64.122,101.119 64.257,100.984 R38.1 ; 48.898,95.275 40.924,95.275 39.819,94.17 C16.1 39.669,94.22 39.669,95.335 37.954,97.05 36.875,97.05 34.007,94.182 34.007,35.57 40.102,29.475 97.712,29.475 v1(99.087,30.85) 99.925,31.688 R8.2 R7.2 103.019,33.526 103.113,33.432 111.702,33.432 112.7,34.43 L2.2@112.7,46.225
+12: "FAN 12V.2" C8.2 C10.1 D.1@92.525,98.225 L3.2 R10.2 R11.2 U1.1 U5.4 | length 130.1
  Top Layer w0.7: 97.854,84.332 99.061,83.125 100.15,83.125 v1(101.466,81.809) ; v1(103.448,79.441) 105.839,79.441 v1(106.434,79.113)
  Top Layer w1: U5.4 60.426,108.662 78.917,90.171 88.205,90.171 90.043,92.009 90.072,92.009 90.582,92.519 ; 90.104,92.519 v1(90.104,93.362) ; 90.471,92.519 95.728,92.519 97.663,90.584 97.663,85.103 97.734,85.032 97.734,84.452 97.854,84.332 ; C10.1 100.059,58.3 v1(100.134,58.225)
  Bottom Layer w1: v1(90.104,93.362) 90.156,93.414 90.156,95.456 92.525,97.825 92.525,98.225 92.525,98.625 93.709,99.809 U1.1 ; v1(100.134,58.225) 96.363,58.225 L3.2 95.626,56.738 98.583,53.78 100.756,53.78 100.818,53.718 C8.2 ; C8.2@100.818,53.724 106.731,53.724 R11.2 106.888,53.818 107.023,53.953 107.023,54.016 107.834,54.827 107.834,70.016 105.098,72.752 105.098,75.204 106.434,76.54 v1(106.434,79.113) ; v1(101.466,81.809) 103.397,79.879 103.397,79.492 v1(103.448,79.441)
A1: C17.1 R22.1 U7.5 | length 7.4
  Bottom Layer w0.4: R22.1 92.978,75.157 93.26,74.875 U7.5
  Bottom Layer w1: C17.1 90.017,75.022 90.152,75.157 R22.1
A2: C13.1 R15.2 U7.6 | length 103.6
  Top Layer w0.7: v1(32.275,99.25) 32.275,85.725 38.85,79.15 v1(81.918,79.15)
  Bottom Layer w0.3: 93.043,79.206 94.3,79.206 U7.6
  Bottom Layer w0.7: v1(32.275,99.25) 32.275,100.05 33.98,101.755 34.807,101.755 35.057,102.005 35.107,102.055 35.407,101.755 35.407,101.655 40.429,96.633 46.558,96.633 50.682,100.757 50.682,101.572 50.967,101.857 R15.2 ; v1(81.918,79.15) 81.974,79.206 93.043,79.206
A3: C22.1 R19.1 R20.2 U7.7 | length 65.4
  Top Layer w0.7: v1(42.001,87.724) 46.901,87.724 53.356,81.269 v1(92.867,81.269)
  Bottom Layer w0.3: v1(92.867,81.269) 93.053,81.083 93.811,81.083 94.8,80.094 U7.7
  Bottom Layer w0.7: C22.1 39.918,90.731 39.918,87.936 R20.2 ; R19.1 R19.1@40.017,84.877 ; R19.1@40.302,85.162 R19.1@40.017,84.877 ; v1(42.001,87.724) 40.13,87.724 R20.2 ; R19.1@40.017,84.877 40.017,85.162 40.017,87.575 R20.2
GPIO16: Q5.3 R36.2 U8.27 | length 48.1
  Top Layer w0.7: v1@84.691,87.966 v1@89.589,87.966 ; v1(98.5,92.07) 104.384,92.07 v1(104.493,92.179)
  Bottom Layer w0.7: v1(84.608,88.05) 84.506,88.152 83.46,88.152 83.05,87.742 83.05,85.225 85.187,83.088 86.344,83.088 R36.2 ; R36.2@86.856,83.275 Q5.3 ; v1@89.589,87.966 v1(89.665,87.89) ; v1@89.605,88.175 92.31,88.175 92.313,88.178 97.807,88.178 98.5,88.871 v1(98.5,92.07) ; v1(104.493,92.179) 108.93,96.616 v1(108.93,99.216) 108.894,99.216 108.235,99.875 106.95,99.875 106.54,100.285 106.54,100.928 106.39,101.078 U8.27
GPIO17: "Interface Port.5" R35.1 U8.28 | length 14.3
  Bottom Layer w0.6: U8.28@107.66,101.91 107.66,105.01 108.672,106.022 111.791,106.022 113.66,107.643 113.66,107.893 112.825,108.728 R35.1
GPIO18: "Interface Port.6" R33.1 U8.30 | length 13.6
  Bottom Layer w0.6: U8.30 110.2,103.914 111.201,104.914 113.471,104.914 116.2,107.643 R33.1
GPIO19: "Interface Port.7" R32.2 U8.31 | length 14.8
  Bottom Layer w0.6: U8.31 111.62,101.978 111.62,103.346 112.03,103.756 114.794,103.756 118.681,107.643 118.74,107.643 118.917,107.82 118.917,109.307 119.525,109.915 R32.2
GPIO23: "Interface Port.8" R34.1 U8.37 | length 11.4
  Bottom Layer w0.7: U8.37@119.152,101.94 119.152,101.89 U8.37 119.009,101.909 119.009,103.684 121.105,105.78 121.105,107.468 121.28,107.643 122.75,109.113 R34.1
GPIO27: R16.1 U8.12 | length 50
  Top Layer w0.7: v1(82.6,110.673) 82.738,110.673 83.86,111.795 88.052,111.795 88.946,110.901 88.946,103.942 93.615,99.273 100.48,99.273 106.81,92.943 v1(106.81,88.059)
  Bottom Layer w0.7: R16.1 79.759,109.749 79.759,109.97 79.823,110.034 81.807,110.034 82.445,110.673 v1(82.6,110.673) ; U8.12@106.368,83.394 106.518,83.544 106.518,84.832 106.81,85.123 v1(106.81,88.059)
GPIO32: R5.2 U1.3 U8.8 | length 38.6
  Top Layer w0.7: U1.3 93.828,107.528 95.647,107.528 111.484,91.691 111.484,88.406 v1(111.375,88.297)
  Bottom Layer w0.7: U1.3 93.862,107.8 95.25,107.8 95.825,108.375 96.4,108.95 R5.2 ; v1(111.375,88.297) 111.462,88.21 111.462,83.407 U8.8@111.448,83.394
GPIO33: R4.2 U1.2 U8.9 | length 39.9
  Top Layer w0.7: U1.2 93.833,104.983 96.478,104.983 109.368,92.094 v1@109.368,88.708
  Bottom Layer w0.7: U1.2 95.557,105.107 99.25,108.8 R4.2 ; v1(109.35,88.691) 109.459,88.582 109.459,87.081 110.178,86.361 U8.9@110.178,83.394
GPIO34: R24.2 U7.2 U8.6 | length 27.6
  Bottom Layer w0.254: U7.2 95.8,73.777 96.482,73.095
  Bottom Layer w0.7: R24.2 R24.2@96.482,71.687 ; 96.482,73.095 R24.2@96.482,71.687 ; U8.6@113.978,83.384 113.978,82.552 113.838,82.412 113.838,81.735 113.428,81.325 106.535,81.325 104.941,79.731 104.941,78.822 101.374,75.254 100.05,75.254 R24.2@96.482,71.687
GPIO35: C21.2 NTC.2 R31.1 U8.7 | length 53.6
  Top Layer w0.7: v1(116.25,87.025) 116.364,87.025 124.4,95.061 124.4,115.9 v1(122.75,117.55)
  Bottom Layer w0.7: NTC.2 114.501,119.35 115.456,120.305 C21.2 117.342,120.362 R31.1@120.756,120.362 ; U8.7@112.718,83.394 112.718,85.491 114.252,87.025 v1(116.25,87.025) ; R31.1@120.7,120.418 R31.1@120.756,120.362 ; R31.1@120.82,120.362 R31.1@120.756,120.362 ; v1(122.75,117.55) 122.693,117.607 122.693,118.907 121.467,120.133 120.985,120.133 R31.1@120.756,120.362
Net1N4007_1_1: 1N4007.1@55.674,52.302 C2.1 F1.2 R37.2 U6.3 U6.4
Net1N4007_1_2: 1N4007.2 C9.1 U2.1 U4.1 | length 61.3
  Top Layer w1.5: v2(68.275,44.275) 73.6,44.275 79.507,50.182 v2(79.591,50.182) ; 75.35,45.2 78.15,42.4 86.907,42.4 v2(87.275,42.768) 87.275,42.187 C9.1@92.225,37.237
  Bottom Layer w1: U4.1 86.974,49.017 ; U2.1@87.275,38.355 87.275,40.018 v2(87.275,42.768)
  Bottom Layer w1.3: v2(79.591,50.182) 85.809,50.182 86.974,49.017
  Bottom Layer w2: 1N4007.2@55.674,47.302 65.174,47.302 68.201,44.275 v2(68.275,44.275)
NetC1_1: C1.1 D.2@87.525,98.225 U1.8 | length 15.5
  Bottom Layer w1.5: C1.1 80.503,103.95 81.886,102.567 U1.8 87.525,101.131 D.2@87.525,98.225
NetC3_1: C3.1 F2.1 L1.P$2 R21.2 R22.2 | length 42.2
  Bottom Layer w1: F2.1 81.769,74.27 84.882,77.383 85.765,77.383 R21.2 85.937,77.481 90.163,77.481 R22.2
  Bottom Layer w2.5: L1.P$2@65.4,85.869 L1.P$2
  Bottom Layer w4: L1.P$2@65.4,85.869 62.775,83.244 C3.1 73.805,74.225 F2.1
NetC4_1: C4.1 R7.1 R8.1 R9.2 U2.3 | length 19.5
  Bottom Layer w0.7: U2.3@87.275,35.495 87.315,35.535 89.745,35.535 90.19,35.979 96.664,35.979 R9.2 R8.1 R7.1 103.024,35.619 106.333,35.619 C4.1
NetC8_1: C8.1 R10.1 R11.1 R12.2 U4.3 | length 34.2
  Bottom Layer w0.7: U4.3 87.024,45.867 92.655,45.867 98.518,51.73 C8.1@100.758,51.73 ; C8.1@100.758,51.709 100.78,51.73 C8.1 C8.1@100.917,51.631 ; R12.2 R12.2@109.726,51.631 ; C8.1@100.917,51.631 R12.2@109.726,51.631 ; C8.1@100.917,51.631 103.825,51.631 106.825,51.631 R12.2@109.726,51.631
NetC11_1: C11.1 Q3.2 U5.2 | length 11.7
  Bottom Layer w0.7: U5.2 66.019,111.227 68.477,111.227 68.477,105.625 67.37,104.518 C11.1 ; 68.477,111.252 Q3.2
NetC11_2: C11.2 R38.2 U5.1 | length 10.1
  Top Layer w1: U5.1 U5.1@66.256,108.4
  Bottom Layer w0.7: C11.2 64.47,104.218 64.47,103.417 66.258,101.629 66.258,101.205 R38.2
  Bottom Layer w1: C11.2 64.17,107.218 65.613,108.662 U5.1
NetC12_1: C12.1 Q4.1 R14.1 R18.1 U5.3 | length 31
  Top Layer w1: v1(49.175,113.25) 49.8,112.625 56.429,112.625 57.852,111.202 U5.3
  Bottom Layer w1: Q4.1 39.107,115.808 C12.1 42.838,111.145 43.037,111.343 R18.1 R14.1 47.164,111.343 49.071,113.25 v1(49.175,113.25) ; U5.3@57.852,111.202 U5.3
NetC14_1: C14.1 U6.6 | length 14
  Top Layer w0.7: v1(42.733,98.126) 42.871,98.126 43.737,97.26 43.755,97.26 44.25,96.765 v1(44.25,93.572)
  Bottom Layer w0.7: C14.1 39.107,102.055 39.407,101.755 39.407,101.655 42.624,98.438 42.624,98.235 v1(42.733,98.126) ; v1(44.25,93.572) 44.359,93.463 44.359,92.907 44.9,92.366 U6.6
NetC15_2: C15.2 Q3.3 R16.2 | length 7.8
  Bottom Layer w0.7: Q3.3 71.752,112.205 75.465,112.205 C15.2 75.524,112.264 79.418,112.264 R16.2
NetC20_2: BOOT.1 BOOT.3 C20.2 R28.1 U8.25 | length 86.8
  Top Layer w0.7: v1(107.05,98.382) 109.105,96.327 116.893,96.327 117.922,97.356 119.473,97.356 v1(119.582,97.465)
  Bottom Layer w0.7: C20.2 95.024,90.301 95.024,93.581 R28.1 95.093,98.568 98.435,101.91 103.85,101.91 104,101.76 104,99.875 105.384,98.491 106.941,98.491 v1(107.05,98.382) ; v1(119.582,97.465) 119.582,94.171 124.86,88.893 124.86,64.605 BOOT.1 BOOT.3
NetC23_2: C23.2 EN.1 EN.3 R26.1 U8.3 | length 32.2
  Bottom Layer w0.5: C23.2@114.749,79.538 114.836,79.625 C23.2@114.914,79.625
  Bottom Layer w0.7: C23.2@114.749,79.538 114.749,78.507 114.269,78.027 111.385,78.027 110.975,77.617 110.975,73.8 112.375,72.4 116.925,72.4 EN.1 EN.3 ; C23.2@114.914,79.625 R26.1 117.547,79.715 117.547,80.954 117.798,81.205 U8.3
NetCN4_1: "FAN 12V.1" Q5.2 | length 3.3
  Bottom Layer w0.7: Q5.2 95.207,84.225 95.314,84.332
NetD1_1: D1.1 R14.2 | length 4.3
  Bottom Layer w1: R14.2 49.787,109.057 D1.1
NetD1_2: D1.2 Q4.3 U6.1 U6.2 | length 38.5
  Top Layer w3: v3(55.025,105.95) 56.275,104.7 v3(56.275,99.375)
  Bottom Layer w2: Q4.3 53.781,118.919 53.781,110.2 54.834,109.147 54.834,106.141 v3(55.025,105.95)
  Bottom Layer w3: 48.145,85.305 56.275,93.435 v3(56.275,99.375)
NetD2_1: D2.1 U8.24 | length 16.7
  Top Layer w0.7: D2.1 95.425,94.995 96.753,96.323 v1(96.84,96.323)
  Bottom Layer w0.7: v1(96.84,96.323) 98.81,98.293 U8.24
NetD2_2: D2.2 R30.1 | length 2.7
  Bottom Layer w0.7: R30.1 86.457,92.03 D2.2@86.925,92.03
NetF1_1: F1.1 PV.1
NetL2_1: D.2@91.775,39.125 L2.1 U2.2 | length 15.2
  Bottom Layer w1: U2.2 89.175,36.885 90.975,38.685 90.975,38.725 91.375,39.125 91.775,39.125 94.46,39.125 98.959,43.624 L2.1
NetL3_1: D.2@91.3,48.65 L3.1 U4.2 | length 18.1
  Bottom Layer w0.7: U4.2@87.474,47.187 88.68,47.187 88.76,47.267
  Bottom Layer w1: L3.1 84.628,56.685 87.24,56.685 91.536,52.389 91.536,48.886 91.05,48.4 89.893,48.4 88.76,47.267
NetQ1_1: D4.1 Q1.1 R1.2 R2.2 | length 11.5
  Bottom Layer w1: R2.2 58.357,118.935 58.824,118.468 D4.1 R1.2 ; R1.2@63.039,118.468 65.955,118.468 66.739,119.252 Q1.1
NetQ1_2: Q1.2 Q4.2 | length 28.7
  Bottom Layer w2: Q4.2 52.447,123.7 68.551,123.7 Q1.2
NetQ2_1: D5.1 Q2.1 R3.2 R6.2 | length 10.9
  Bottom Layer w0.7: R6.2 84.207,119.06 D5.1 84.203,118.998 88.021,118.998 R3.2 88.19,119.111 92.41,119.111 Q2.1
NetR1_1: D4.2 R1.1 U1.7 | length 32.6
  Top Layer w1: v1(65.45,114.375) 69.715,114.375 78.99,105.1 86.082,105.1 U1.7
  Bottom Layer w1: D4.2 59.624,113.468 62.203,116.047 62.84,116.047 R1.1 63.039,116.182 64.846,114.375 v1(65.45,114.375)
NetR3_1: D5.2 R3.1 U1.5 | length 10.5
  Bottom Layer w0.7: U1.5 84.174,112.102 D5.2 84.185,114.037 84.185,115.417 84.195,115.427 84.195,115.527 85.252,116.584 87.949,116.584 R3.1
NetR13_1: R13.1 R15.1 R17.2 | length 8
  Bottom Layer w0.7: R17.2 R13.1 R15.1
NetR13_2: R13.2 U6.7 | length 11.6
  Top Layer w0.7: v1(46.187,98.489) 46.21,98.467 46.21,93.156 v1(46.232,93.134)
  Bottom Layer w0.7: U6.7 46.17,90.969 46.201,91 46.201,93.103 v1(46.232,93.134) ; v1(46.187,98.489) 46.187,98.643 47,99.456 R13.2
NetR19_2: R19.2 R37.1 | length 3
  Bottom Layer w0.7: R37.1 R19.2
NetR21_1: R21.1 R23.2 | length 3
  Bottom Layer w1: R21.1 85.9,72.412 86.035,72.277 R23.2
NetSS1_1: SS1.1 UART.2 | length 10
  Top Layer w1: SS1.1 108.7,71.676 108.95,71.926 115.576,71.926 116.34,72.69 116.34,74.18 UART.2
"Out +": 1N4007.1@65.174,52.302 BATT.1 F2.2 | length 24.6
  Bottom Layer w4: 1N4007.1@65.174,52.302 65.206,52.27 F2.2 74.719,51.401 BATT.1
"Out -": "Interface Port.1" BATT.2 BOOT.2 BOOT.4 C2.2 C3.2 C5.2 C6.2 C7.2 C9.2 C10.2 C12.2 C13.2 C14.2 C15.1 C16.2 C17.2 C18.1 C19.2 C20.1 C21.1 C22.2 C23.1 D.1@91.3,43.65 D.1@91.775,34.125 EN.2 EN.4 PV.2 Q2.3 Q3.1 Q5.1 R4.1 R5.1 R6.1 R9.1 R12.1 R17.1 R18.2 R20.1 R23.1 R30.2 R31.2 R36.1 U1.4 U2.4 U2.5 U2.6 U2.7 U2.8 U3.1 U4.4 U4.5 U4.6 U4.7 U4.8 U6.5 U7.1 U7.3 U8.1 U8.15 U8.38 U8.39 UART.1 | length 647.1
  Top Layer w0.7: v1(50.175,80.802) 50.077,80.9 46.714,80.9 40.508,87.106 40.508,87.517 v4(35.65,92.375) 39.102,95.827 39.102,96.607 42.446,99.95 v1(44.775,99.95) 44.871,100.046 47.854,100.046 56.475,91.425 73.45,91.425 v1(80.925,83.95) ; v1(69.825,102.699) 73.699,98.825 v1(80.925,98.825) ; v1(88.684,121.4) 88.684,119.077 88.049,118.442 88.049,116.274 90.353,113.97 v1(93.499,113.97) ; Q2.3 106.271,119.252 109.248,116.275 v1(117.775,116.275) 117.775,113.511 122.951,108.335 122.951,106.951 122.55,106.55 122.55,104.75 v1(122.581,104.719) ; v1(108.685,85.705) 108.794,85.596 114.426,85.596 ; v1(108.7,76) 108.7,74.3 108.039,74.3 105.925,72.186 C7.2 111.645,66.25 EN.2 ; 108.778,74.3 UART.1 ; v1(120.479,86.203) 119.246,84.97 115.052,84.97 114.426,85.596 ; v5(122.75,95.95) 114.426,87.626 114.426,85.596
  Top Layer w0.8: v1(82.325,68.35) 82.325,60.075 84.1,58.3 C10.2 86.25,53.15 96.925,42.475 96.925,33.432 94.668,31.175 82.777,31.175 80.125,33.827 v1(80.125,36.975) 83.288,36.975 C9.2
  Top Layer w1: v1(79.8,77.05) 79.825,77.075 v1(92.553,77.075) v1(92.553,73.095) ; v1(80.925,83.95) 83.248,86.273 v1(84.543,86.273) ; U3.1 108.25,54.325 108.69,53.885 C5.2 109.19,43.675 114.525,38.34 v1(114.525,37.012) C6.2@110.475,37.012
  Top Layer w2: C3.2 55.155,73.845 62.775,66.225 C2.2 62.775,57.434 64.229,55.979 BATT.2
  Bottom Layer w0.1: U7.3@95.2,74.775 U7.3
  Bottom Layer w0.3: 94.8,77.007 95.3,76.507 95.3,76.132 ; U7.3 95.3,76.132 ; 96.3,75.575 96.3,76.132 96.124,76.308 95.476,76.308 95.3,76.132
  Bottom Layer w0.4: U4.6@82.049,45.939 82.074,46.017 U4.7 82.039,47.287 82.077,47.387 U4.8@82.077,48.454 ; U4.5@82.071,44.65 U4.6@82.071,45.914 ; U4.5 82.113,44.547 82.113,43.296 ; U2.8@82.355,38.135 82.143,38.255 82.113,38.34 82.113,43.296 ; U2.5 82.413,34.445 82.413,35.515 U2.6 82.413,35.715 82.413,36.785 U2.7 82.413,36.985 82.413,38.055 U2.8 ; U2.5@82.395,34.325 83.025,34.264 83.125,33.96 83.535,33.55 84.121,33.168 85.606,33.168 86.115,33.55 86.525,33.96 86.683,34.245 U2.4 ; U2.4@87.295,34.325 90.825,34.325 D.1@91.775,34.144 ; D.1@91.28,43.63 88.56,43.63 87.624,44.566 U4.4 86.424,44.647 85.073,43.296 82.113,43.296 ; D.1@91.794,34.125 92.725,33.575 96.426,33.431 R9.1@96.905,33.412
  Bottom Layer w0.7: R20.1 37.919,88.025 37.919,90.93 37.619,91.23 36.795,91.23 v4(35.65,92.375) ; C16.2 37.919,93.97 37.619,93.67 36.945,93.67 v4(35.65,92.375) ; R18.2 43.006,109.151 39.201,109.151 C12.2 38.894,109.032 37.857,109.032 v1(36.425,107.6) 35.007,106.182 C13.2 C14.2 40.807,103.955 41.377,103.386 41.377,103.22 42.454,102.142 42.715,102.142 R17.1 43.064,101.857 44.666,100.255 44.666,100.059 v1(44.775,99.95) ; U6.5 43.63,90.9 42.092,92.438 35.713,92.438 v4(35.65,92.375) ; v1@69.825,102.994 69.825,106.95 71.744,108.869 Q3.1 71.746,110.31 75.465,110.31 C15.1 C15.1@75.481,110.293 ; v1(82.325,68.35) 84.345,68.35 85.986,69.991 R23.1 86.127,70.069 89.939,70.069 C17.2 92.379,70.147 ; v1(84.543,86.273) 84.652,86.382 85.627,86.382 87.438,88.194 87.447,88.194 87.95,88.696 87.95,88.894 88.743,89.687 89.047,89.383 91.81,89.383 91.813,89.386 92.309,89.386 93.055,90.132 C20.1 ; R36.1 86.514,85.204 89.82,85.204 91.478,86.863 U8.15 102.25,87.013 103.652,87.013 106.907,90.267 108.089,90.267 109.715,91.893 U8.39 116.735,91.893 120.488,88.139 120.488,86.212 120.413,86.137 U8.1@120.413,83.569 ; R6.1 v1(88.684,121.4) ; v1(92.553,73.095) 92.553,70.566 cw(c91.96,70.566) 92.379,70.147 ; U1.4 93.709,113.76 v1(93.499,113.97) 96.273,113.97 R5.1 96.425,113.818 99.225,113.818 R4.1 99.307,113.793 99.351,113.837 99.351,113.755 99.386,113.721 101.191,113.721 ; C18.1 96.78,68.107 94.741,70.147 92.379,70.147 ; Q2.3 103.448,113.948 103.148,113.648 C19.2 102.996,113.721 101.191,113.721 ; 103.5,107.643 101.191,109.952 101.191,113.721 ; v1(108.7,76) 108.778,77.128 111.225,79.576 112.787,79.576 C23.1 ; UART.1 115.695,76.075 118.74,76.075 121.236,78.571 121.236,80.679 120.488,81.427 120.488,83.162 U8.1 ; C21.1 117.513,118.179 119.44,118.179 R31.2@120.062,117.557 ; v1(117.775,116.275) 117.884,116.384 118.889,116.384 R31.2@120.062,117.557 ; R31.2 R31.2@120.062,117.557 ; U8.38 120.36,102.578 122.532,104.75 122.55,104.75 122.65,104.65 122.65,96.05 v5(122.75,95.95)
  Bottom Layer w1: v1(79.8,77.05) 79.8,82.752 80.925,83.877 v1(80.925,83.95) v1(80.925,98.825) v1@80.975,98.875 ; 85.433,86.222 86.277,85.378 86.34,85.378 R36.1 ; v1(92.553,77.075) 94.732,77.075 94.8,77.007 ; R12.1 109.96,53.953 111.403,53.953 111.436,53.986 112.075,53.346 114.379,53.346 BOOT.2@114.547,53.178 ; EN.4 EN.2 114.547,63.347 BOOT.2@114.547,53.178 ; v1(114.525,37.012) 114.625,37.112 BOOT.2 BOOT.2@114.547,53.178
  Bottom Layer w2: v1(50.175,80.802) 50.175,79.205 C3.2
RX: U8.34 UART.3 | length 31.9
  Bottom Layer w0.7: U8.34 115.28,101.013 115.365,100.928 115.365,94.971 122.444,87.892 122.444,77.744 UART.3
SCL: "Interface Port.4" R25.1 U7.10 U8.36 | length 58.8
  Top Layer w0.7: v1(105.05,86.2) 105.066,86.216 107.085,86.216 108.067,87.198 111.81,87.198 121.075,96.462 121.075,101.728 v1@117.976,104.827 ; 111.12,107.643 112.844,105.919 114.592,105.919 115.662,104.848 117.912,104.848 v1(117.955,104.806)
  Bottom Layer w0.3: U7.10 96.3,79.67 97.09,80.034
  Bottom Layer w0.7: 97.09,80.034 97.956,80.034 97.985,80.005 99.215,80.005 99.973,80.763 99.973,84.123 101.35,85.5 104.196,85.5 104.896,86.2 v1(105.05,86.2) ; R25.1 109.525,109.238 111.12,107.643 110.885,107.408 ; U8.36@117.801,102.728 117.801,104.184 117.846,104.229 117.846,104.697 v1(117.955,104.806)
SDA: "Interface Port.3" R27.1 U7.9 U8.33 | length 52.8
  Top Layer w0.4: 108.58,107.643 108.584,107.639
  Top Layer w0.7: v1(98.48,81.498) 98.5,81.498 99.682,80.316 102.085,80.316 103.557,81.788 103.557,86.931 104.615,87.989 v1(104.615,90.406) ; 108.584,107.639 108.584,101.816 112.167,98.233 112.631,98.233 v1(112.74,98.124)
  Bottom Layer w0.2: U7.9 U7.9@95.8,79.675
  Bottom Layer w0.3: U7.9@95.8,79.675 95.8,80.831 96.459,81.49 98.472,81.49 v1(98.48,81.498)
  Bottom Layer w0.4: U8.33@113.98,101.94 113.823,102.097 113.823,102.453 114.01,102.641 U8.33@114.004,102.646
  Bottom Layer w0.7: v1(104.615,90.406) 104.724,90.515 105.446,90.515 106.406,91.475 106.406,91.905 112.626,98.124 v1(112.74,98.124) 112.74,98.137 113.925,99.322 113.925,101.743 U8.33 ; R27.1 106.475,109.748 108.58,107.643 108.621,107.602
TX: U8.35 UART.4 | length 31.3
  Bottom Layer w0.7: U8.35 116.573,101.805 116.573,95.471 123.652,88.393 123.652,76.412 UART.4
VS: C1.2 L1.P$1 Q1.3 Q2.2 R2.1 U1.6 | length 87.1
  Top Layer w1: 78.448,121.716 78.448,121.879
  Top Layer w2: v2(63.039,120.775) 63.039,121.514 64.849,123.325 77.002,123.325 78.448,121.879 ; 78.448,121.716 Q1.3 78.83,118.869 78.83,117.455 78.839,117.446 78.839,114.988 79.95,113.877 79.95,108.471 v6(79.204,107.725)
  Bottom Layer w1.5: R2.1@61.193,120.775 v2(63.039,120.775)
  Bottom Layer w2: L1.P$1 65.878,96.483 69.758,96.483 73.427,100.152 73.51,100.235 C1.2 73.51,105.971 75.264,107.725 79.95,107.725 80.028,107.647 U1.6 ; Q1.3@78.065,118.869 Q1.3 82.821,123.625 93.626,123.625 Q2.2
pads on no net: ?.1 BATT. PV. U2.12 U4.12 U7.4 U8.4 U8.5 U8.10 U8.11 U8.13 U8.14 U8.16 U8.17 U8.18 U8.19 U8.20 U8.21 U8.22 U8.23 U8.26 U8.29 U8.32

## Polygon pours and split planes (outlines as drawn)
"Out -" on Bottom Layer "OUT_-_L02_P010" (solid, remove dead copper, pour order 10): 29.852,129.243 131.677,129.243 131.677,26.118 29.102,26.118
"Out +" on Bottom Layer "OUT_+_L02_P002" (solid, remove dead copper, pour order 2): 61.806,54.391 61.806,50.025 69.9,50.025 69.9,30.025 78.85,30.025 78.85,54.391
no net on Bottom Layer "NONET_L02_P012" (solid, remove dead copper, pour order 12): 40.8,25.85 40.8,54.475 40.8,63.65 43.35,63.65 51.75,54.475 51.75,25.6
VS on Bottom Layer "VS_L02_P005" (solid, remove dead copper, pour order 5): 61.825,98.9 61.825,92.3 67.994,92.3 74.78,99.086 74.78,107.505 72.912,107.505 71.45,106.043 71.45,101 69.825,99.375 61.825,99.375
Net1N4007_1_1 on Bottom Layer "NET1N4007_1_1_L02_P008" (solid, remove dead copper, pour order 8): 42.785,85.554 45.236,85.554 45.236,81.923 47.494,73.732 59.24,61.986 59.24,52.055 58.238,51.052 51.765,51.052 51.765,54.102 39.306,66.9 39.306,75.012 39.306,80.836 39.306,83.518 41.238,83.518 41.885,84.166 ccw(c11.512,104.84)
NetD1_2 on Bottom Layer "NETD1_2_L02_P006" (solid, remove dead copper, pour order 6): 45.8,85.781 45.8,83.725 47.694,80.7 47.7,80.7 47.719,80.719 59.211,90.686 59.35,90.825 59.35,101.053 55.603,101.053 52.725,98.175 52.725,93.975
NetQ1_2 on Bottom Layer "NETQ1_2_L02_P007" (solid, remove dead copper, pour order 7): 45.057,117.658 45.057,116.128 50.925,116.128 50.925,121.716 51.909,122.7 68.375,122.7 70.5,120.575 70.5,116.412 71.085,115.827 75.189,115.827 75.942,116.579 75.942,123.325 70.775,126.325 69.675,126.95 47.775,126.95 45.051,124.226 45.051,116.128
NetD1_2 on Bottom Layer "NETD1_2_L02_P011" (solid, remove dead copper, pour order 11): 50.925,119.8 50.925,115.525 52.528,115.525 52.528,103.8 57.85,103.8 57.85,107.125 56.45,107.125 55.8,107.775 55.938,107.637 55.45,110.55 55.45,122 52.75,122
NetF1_1 on Bottom Layer "NETF1_1_L02_P009" (solid, remove dead copper, pour order 9): 37.675,26.875 37.675,55.5 37.675,64.675 40.225,64.675 48.625,55.5 48.625,26.625
"Out -" on Top Layer "OUT_-_L01_P004" (solid, remove dead copper, pour order 4): 30.203,129.367 131.978,129.367 131.978,26.632 29.403,26.632
Net1N4007_1_1 on Top Layer "NET1N4007_1_1_L01_P001" (solid, remove dead copper, pour order 1): 51.765,51.052 58.238,51.052 59.24,52.055 59.24,63.537 46.55,76.227 39.677,76.227 38.3,74.85 38.3,66.2
NetF1_1 on Top Layer "NETF1_1_L01_P003" (solid, pour order 3): 29.7,26.85 29.7,58.05 48.12,54.13 48.15,54.1 48.15,26.85
NetF1_1 on Top Layer "NETF1_1_L01_P013" (solid, pour order 13): 37.675,31.236 37.675,54.1 48.15,54.1 48.15,31.275

## Silkscreen, mask and mechanical layers (free items; w line width, h text height)
Top Overlay:
  text "PT Agraprana Cahya Wijaya" at 128.709,38.975 h2 r90
  text "Solar Charge Controller" at 33.024,37.775 h2 r90
  text "Ahmad Hanif Abiyyu Khrisna_2122500031" at 44.625,27.966 h2
Bottom Overlay:
  text "PT Agraprana Cahya Wijaya" at 128.609,87.3 h2 r90
  text "Solar Charge Controller" at 32.909,84.225 h2 r90
  text "Ahmad Hanif Abiyyu Khrisna_2122500031" at 115.85,26.9 h2
Mechanical 1:
  the board outline again, w0.254
Bottom Component Center:

## Text inside footprints (layer, text, board x,y; h text height)
C1: Top Overlay "+" at 79.425,104.7 h1.5 r180; Bottom Overlay "+" at 79.425,104.7 h1.5 r180
"Interface Port": Top Overlay "GND" at 104.148,109.396 h0.7 r90; Top Overlay "3.3V" at 106.69,109.396 h0.7 r90; Top Overlay "SDA" at 109.232,109.396 h0.7 r90; Top Overlay "SCL" at 111.774,109.396 h0.7 r90; Top Overlay "17" at 114.315,109.396 h0.7 r90; Top Overlay "18" at 116.857,109.396 h0.7 r90; Top Overlay "19" at 119.399,109.396 h0.7 r90; Top Overlay "23" at 121.941,109.396 h0.7 r90